# Altium PCB E001-V2.1.PcbDoc (part 2 of 2)
Units mm, origin at the board's own origin, x right, y up, seen from the top; angles counter-clockwise.
Board outline 10.25 x 28.76 mm, 4 copper layers (Top Layer, SIG, GND, Bottom Layer); 47 components, 39 nets, 149 pads, 107 vias.
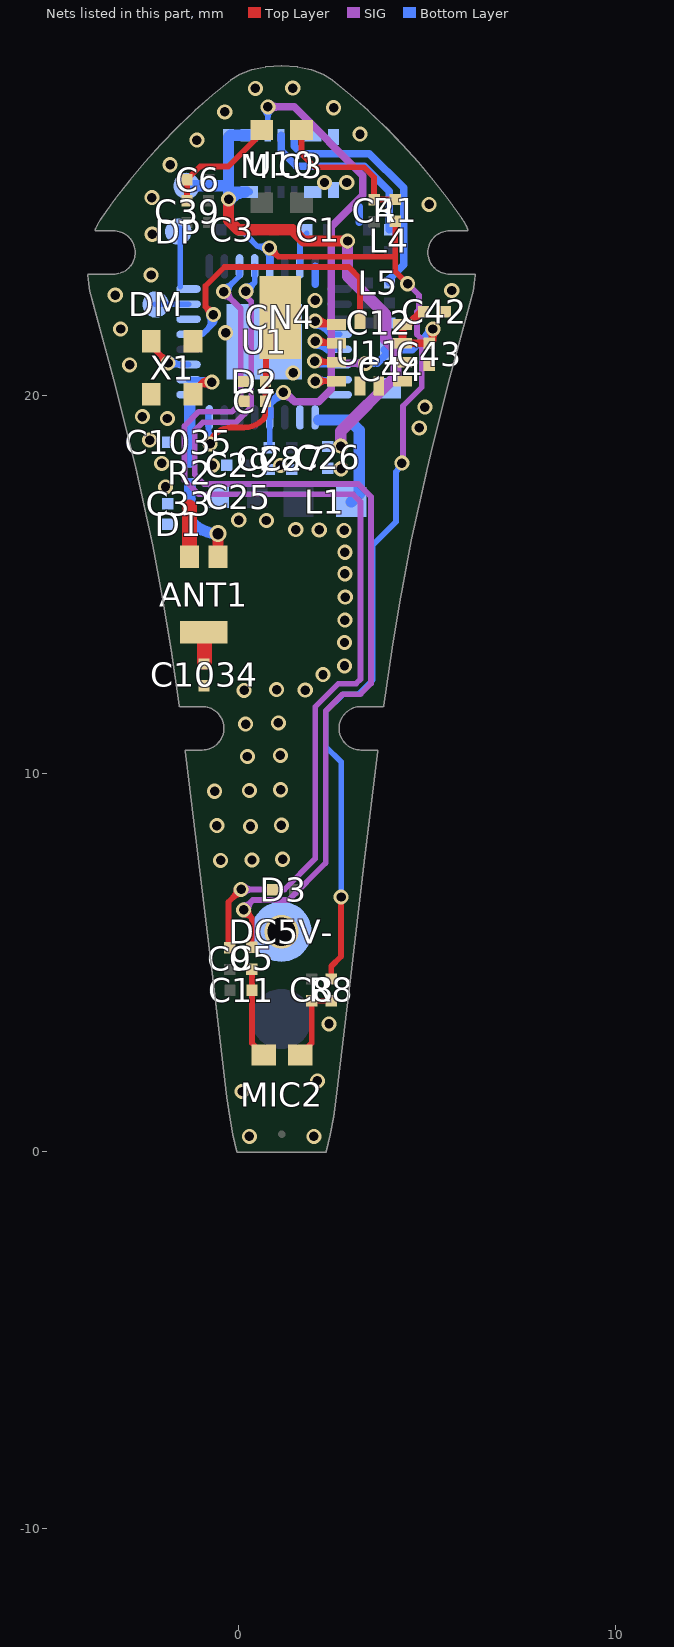
[diagram p4: the nets of this part, all layers, seen from the top]

## Via types
v1: diameter 0.4, hole 0.25, Top Layer to Bottom Layer, tented both sides, 104 vias
v2: diameter 0.9, hole 0.75, Top Layer to Bottom Layer, tented both sides, 2 vias
v3: diameter 0.45, hole 0.3, Top Layer to Bottom Layer, tented both sides, 1 vias

## Nets (pads, with @x,y where several pads share a name; then routed paths per layer and width w, separated by ;. In a path a pad name is that pad's centre, name@x,y a point inside that pad or via, vN(x,y) a via of type N, cw(c..) or ccw(c..) an arc to the next point about the centre after c; other vN are vias at no path point) (continued)
GND: ANT1.1 C7.1 C12.2 C25.1 C26.2 C27.2 C28.1 C29.1 C33.2 C42.1 C43.1 C44.1 C1034.1 C1035.2 D1.1 D2.2 D3.1 DC5V-.1 U1.0 U1.8 U10.8 U11.5 U11.6 U11.7 U11.8 X1.2 X1.4 | length 2.2
  Top Layer w0.4: ANT1.1@-1.28,15.74 -1.28,17.06
  Bottom Layer w0.2: 2.04,22.957 2.04,23.43 ; 3.21,24.6 3.21,25.01
  other v1: 0.3,0.39 2.01,0.39 0.11,1.58 2.1,1.86 2.41,3.37 -0.46,7.7 0.37,7.71 1.18,7.73 0.33,8.6 -0.56,8.62 1.15,8.63 -0.62,9.53 0.3,9.55 1.13,9.57 0.25,10.45 1.12,10.48 0.2,11.31 1.07,11.34 0.16,12.2 1.78,12.21 1.02,12.22 2.25,12.62 2.82,12.85 2.82,13.47 2.83,14.06 2.84,14.67 2.83,15.29 2.83,15.86 1.53,16.46 2.15,16.45 2.81,16.44 0.02,16.71 0.75,16.7 -1.92,17.59 2.73,18.07 -0.68,18.16 1.12,18.16 -2.02,18.21 -2.34,18.83 4.8,19.15 -1.87,19.4 -2.53,19.45 4.95,19.7 1.46,20.61 -2.87,20.82 -0.33,21.67 -3.11,21.77 2.04,22.53 -3.25,22.67 5.66,22.79 -2.3,23.2 -2.27,24.28 5.06,25.07 -2.28,25.25 2.29,25.65 2.88,25.65 -1.8,26.12 -1.09,26.77 3.23,26.93 -0.35,27.52 2.53,27.63 0.46,28.14 1.45,28.15
  other v2: 1.15,5.81
IIC_CLK: U1.21 U11.12 | length 12.8
  Top Layer w0.15: v1(-0.65,22.15) -0.86,22.36 ; U11.12@3.23,22.015 3.23,23.112 2.931,23.411 0.47,23.411 -0.361,23.411 -0.86,22.912 -0.86,22.36 ; -0.86,22.36 ccw(c-0.655,22.565) v1@-0.651,22.275 ; -0.86,22.36 cw(c-1.065,22.155) v1@-0.775,22.151 ; -0.86,22.36 ccw(c-0.655,22.565) v1@-0.651,22.275 ; -0.86,22.36 cw(c-1.065,22.155) v1@-0.775,22.151 ; -0.86,22.36 ccw(c-0.655,22.565) v1@-0.651,22.275 ; -0.86,22.36 cw(c-1.065,22.155) v1@-0.775,22.151 ; -0.86,22.36 ccw(c-0.655,22.565) v1@-0.651,22.275 ; -0.86,22.36 cw(c-1.065,22.155) v1@-0.775,22.151 ; -0.86,22.36 ccw(c-0.655,22.565) v1@-0.651,22.275 ; -0.86,22.36 cw(c-1.065,22.155) v1@-0.775,22.151
  Bottom Layer w0.15: U1.21@-1.31,21.63 -0.939,21.63 -0.65,21.919 ; -0.823,21.746 ccw(c-1.04,21.963) v1@-0.763,22.096 ; -0.823,21.746 ccw(c-1.04,21.963) v1@-0.763,22.096 ; -0.823,21.746 ccw(c-1.04,21.963) v1@-0.763,22.096 ; -0.823,21.746 ccw(c-1.04,21.963) v1@-0.763,22.096 ; -0.823,21.746 ccw(c-1.04,21.963) v1@-0.763,22.096 ; -0.673,21.896 ccw(c-0.838,22.06) v1@-0.627,22.161 ; -0.673,21.896 ccw(c-0.838,22.06) v1@-0.627,22.161 ; -0.673,21.896 ccw(c-0.838,22.06) v1@-0.627,22.161 ; -0.673,21.896 ccw(c-0.838,22.06) v1@-0.627,22.161 ; -0.673,21.896 ccw(c-0.838,22.06) v1@-0.627,22.161
IIC_DAT: U1.22
IOVDD: C28.2 C42.2 C43.2 C44.2 U1.12 U10.3 U11.9 U11.10 | length 36
  Top Layer w0.15: U11.10@4.435,21.89 U11.10@4.501,21.89
  Top Layer w0.2: U11.10@4.355,21.89 U11.9@4.355,21.39 C43.2@5.06,21.39 5.15,21.48 5.15,21.78 v1@5.14,21.79 ; U11.10@4.501,21.89 4.514,21.89 C42.2@4.877,22.253 ; v1@5.089,21.699 cw(c4.943,21.553) 5.15,21.553 ; v1@5.089,21.699 cw(c4.943,21.553) 5.15,21.553 ; v1@5.089,21.699 cw(c4.943,21.553) 5.15,21.553 ; v1@5.089,21.699 cw(c4.943,21.553) 5.15,21.553 ; v1@5.089,21.699 cw(c4.943,21.553) 5.15,21.553 ; v1@5.089,21.699 cw(c4.943,21.553) 5.15,21.553 ; v1@5.089,21.699 cw(c4.943,21.553) 5.15,21.553 ; v1@5.089,21.699 cw(c4.943,21.553) 5.15,21.553 ; v1@5.089,21.699 cw(c4.943,21.553) 5.15,21.553 ; C43.2@5.15,21.504 cw(c5.426,21.504) v1@5.231,21.699 ; C43.2@5.15,21.504 cw(c5.426,21.504) v1@5.231,21.699 ; C43.2@5.15,21.504 cw(c5.426,21.504) v1@5.231,21.699 ; C43.2@5.15,21.504 cw(c5.426,21.504) v1@5.231,21.699 ; C43.2@5.15,21.504 cw(c5.426,21.504) v1@5.231,21.699 ; C43.2@5.15,21.504 cw(c5.426,21.504) v1@5.231,21.699 ; C43.2@5.15,21.504 cw(c5.426,21.504) v1@5.231,21.699 ; C43.2@5.15,21.504 cw(c5.426,21.504) v1@5.231,21.699 ; C43.2@5.15,21.504 cw(c5.426,21.504) v1@5.231,21.699
  SIG w0.2: v1(0.79,27.65) 1.484,27.65 3.307,25.827 3.307,25.313 2.473,24.479 2.473,20.18 2.133,19.84 1.5,19.84 v1@1.25,20.09 ; 2.493,20.86 v1(3.38,20.86) ; v1@0.861,27.579 cw(c1.031,27.409) 1.031,27.65 ; v1@0.861,27.579 cw(c1.031,27.409) 1.031,27.65 ; v1@0.861,27.579 cw(c1.031,27.409) 1.031,27.65 ; v1@0.861,27.579 cw(c1.031,27.409) 1.031,27.65 ; v1@0.861,27.579 cw(c1.031,27.409) 1.031,27.65 ; v1@0.861,27.579 cw(c1.031,27.409) 1.031,27.65 ; v1@0.861,27.721 ccw(c1.031,27.891) 1.031,27.65 ; v1@0.861,27.721 ccw(c1.031,27.891) 1.031,27.65 ; v1@0.861,27.721 ccw(c1.031,27.891) 1.031,27.65 ; v1@0.861,27.721 ccw(c1.031,27.891) 1.031,27.65 ; v1@0.861,27.721 ccw(c1.031,27.891) 1.031,27.65 ; v1@0.861,27.721 ccw(c1.031,27.891) 1.031,27.65 ; v1@1.2,19.99 cw(c1.2,19.628) 1.456,19.884 ; v1@1.2,19.99 cw(c1.2,19.628) 1.456,19.884 ; v1@1.2,19.99 cw(c1.2,19.628) 1.456,19.884 ; v1@1.2,19.99 cw(c1.2,19.628) 1.456,19.884 ; v1@1.2,19.99 cw(c1.2,19.628) 1.456,19.884 ; v1@1.2,19.99 cw(c1.2,19.628) 1.456,19.884 ; 3.139,20.86 cw(c3.139,20.619) v1@3.309,20.789 ; 3.139,20.86 ccw(c3.139,21.101) v1@3.309,20.931 ; 3.139,20.86 ccw(c3.139,21.101) v1@3.309,20.931 ; 3.139,20.86 cw(c3.139,20.619) v1@3.309,20.789 ; 3.139,20.86 ccw(c3.139,21.101) v1@3.309,20.931 ; 3.139,20.86 cw(c3.139,20.619) v1@3.309,20.789 ; 3.139,20.86 ccw(c3.139,21.101) v1@3.309,20.931 ; 3.139,20.86 cw(c3.139,20.619) v1@3.309,20.789 ; 3.139,20.86 ccw(c3.139,21.101) v1@3.309,20.931 ; 3.139,20.86 cw(c3.139,20.619) v1@3.309,20.789 ; 3.139,20.86 ccw(c3.139,21.101) v1@3.309,20.931 ; 3.139,20.86 cw(c3.139,20.619) v1@3.309,20.789
  Bottom Layer w0.15: U10.3@0.79,26.9 v1(0.79,27.65) ; C28.2@0.82,18.64 0.82,18.63 0.84,18.65 U1.12@0.84,19.43 ; U1.12@0.82,19.43 U1.12@0.82,19.53 ; C44.2@3.87,21.22 C44.2@4.04,21.22 ; v1@0.702,27.562 cw(c0.488,27.348) 0.79,27.348 ; v1@0.702,27.562 cw(c0.488,27.348) 0.79,27.348 ; v1@0.702,27.562 cw(c0.488,27.348) 0.79,27.348 ; v1@0.702,27.562 cw(c0.488,27.348) 0.79,27.348 ; v1@0.702,27.562 cw(c0.488,27.348) 0.79,27.348 ; v1@0.702,27.562 cw(c0.488,27.348) 0.79,27.348 ; 0.79,27.348 cw(c1.092,27.348) v1@0.878,27.562 ; 0.79,27.348 cw(c1.092,27.348) v1@0.878,27.562 ; 0.79,27.348 cw(c1.092,27.348) v1@0.878,27.562 ; 0.79,27.348 cw(c1.092,27.348) v1@0.878,27.562 ; 0.79,27.348 cw(c1.092,27.348) v1@0.878,27.562 ; 0.79,27.348 cw(c1.092,27.348) v1@0.878,27.562
  Bottom Layer w0.2: U1.12@0.84,19.43 0.84,19.79 v1@1.14,20.09 ; v1@3.451,20.931 ccw(c3.597,21.077) 3.597,20.87 ; 3.69,20.87 C44.2@4.04,21.22 4.61,21.22 v1(5.16,21.77) ; C44.2@3.87,21.22 C44.2@3.955,21.305 ; 0.927,19.877 cw(c1.2,19.604) v1@1.2,19.99 ; 0.927,19.877 cw(c1.2,19.604) v1@1.2,19.99 ; 0.927,19.877 cw(c1.2,19.604) v1@1.2,19.99 ; 0.927,19.877 cw(c1.2,19.604) v1@1.2,19.99 ; 0.927,19.877 cw(c1.2,19.604) v1@1.2,19.99 ; 0.927,19.877 cw(c1.2,19.604) v1@1.2,19.99 ; 4.989,21.599 cw(c5.16,21.429) v1@5.16,21.67 ; 4.989,21.599 ccw(c4.819,21.77) v1@5.06,21.77 ; 4.989,21.599 cw(c5.16,21.429) v1@5.16,21.67 ; 4.989,21.599 ccw(c4.819,21.77) v1@5.06,21.77 ; 4.989,21.599 cw(c5.16,21.429) v1@5.16,21.67 ; 4.989,21.599 ccw(c4.819,21.77) v1@5.06,21.77 ; 4.989,21.599 ccw(c4.819,21.77) v1@5.06,21.77 ; 4.989,21.599 cw(c5.16,21.429) v1@5.16,21.67 ; 4.989,21.599 ccw(c4.819,21.77) v1@5.06,21.77 ; 4.989,21.599 cw(c5.16,21.429) v1@5.16,21.67 ; 4.989,21.599 ccw(c4.819,21.77) v1@5.06,21.77 ; 4.989,21.599 cw(c5.16,21.429) v1@5.16,21.67 ; 4.989,21.599 ccw(c4.819,21.77) v1@5.06,21.77 ; 4.989,21.599 cw(c5.16,21.429) v1@5.16,21.67 ; 4.989,21.599 ccw(c4.819,21.77) v1@5.06,21.77 ; 4.989,21.599 cw(c5.16,21.429) v1@5.16,21.67
  other v1: 1.2,20.09
MIC_VDD: C3.1 R1.2 R8.2 U1.29 | length 27.8
  Top Layer w0.15: v1@0.83,23.795 cw(c0.83,23.493) 1.043,23.707 cw(c1.257,23.92) v1@0.955,23.92 ; v1(0.83,23.92) 1.062,23.688 4.132,23.688 ; R8.2@2.47,4.56 2.47,4.898 2.725,5.153 v1@2.725,6.685 ; R1.2@4.16,24.62 4.16,23.3 v1(4.49,22.97)
  SIG w0.15: v1@4.37,18.22 4.37,19.733 4.863,20.226 4.863,21.498 4.738,21.623 4.738,22.229 4.792,22.283 4.792,22.668 v1(4.49,22.97)
  Bottom Layer w0.15: C3.1@0.13,24.4 0.13,24.344 0.257,24.217 0.516,23.958 ; 0.62,23.958 ccw(c0.62,24.13) v1@0.742,24.008 ; v1@0.728,23.848 ccw(c0.516,23.7) 0.516,23.958 ; v1@0.792,23.958 0.516,23.958 ; v1(2.73,6.73) 2.73,10.31 2.32,10.72 2.32,11.29 2.32,11.64 2.778,12.098 3.19,12.098 3.569,12.477 3.569,16.052 4.182,16.665 4.182,17.992 ; 4.217,18.027 ccw(c4.143,18.101) v1@4.233,18.156
  Bottom Layer w0.2: v1@0.759,23.849 cw(c0.564,23.654) U1.29@0.84,23.654 ; v1(0.83,23.92) 0.84,23.91 U1.29@0.84,23.43 ; U1.29@0.84,23.703 cw(c1.047,23.703) v1@0.901,23.849
  other v1: 4.34,18.22
NetANT1_2: ANT1.2 C33.1 D1.2 R2.2 | length 2.8
  Top Layer w0.3: ANT1.2@-0.53,15.81 v3(-0.53,16.35)
  Bottom Layer w0.3: D1.2@-1.28,16.6 -1.28,16.82 ; R2.2@-1.28,17.67 C33.1@-1.28,17.14 -1.28,16.82 ; v3(-0.53,16.35) cw(c-0.53,17.292) -1.196,16.626 D1.2@-1.202,16.632 ; -1.28,16.82 ccw(c-1.015,16.82) D1.2@-1.202,16.632 ; -1.28,16.82 ccw(c-1.015,16.82) D1.2@-1.202,16.632
NetANT1_3: ANT1.3 C1034.2 | length 0.9
  Top Layer w0.4: C1034.2@-0.89,12.95 ANT1.3@-0.89,13.805
NetC4_1: C4.1 MIC3.1 R1.1 | length 4
  Top Layer w0.15: MIC3.1@1.68,27.04 1.68,26.41 2.038,26.052 3.337,26.052 3.6,25.789 C4.1@3.6,25.2 ; C4.1@3.622,25.202 C4.1@3.62,25.2 ; R1.1@4.13,25.23 R1.1@4.16,25.2 C4.1@3.62,25.2 ; C4.1@3.6,25.2 C4.1@3.62,25.2 ; C4.1@3.6,25.2 C4.1@3.61,25.19 C4.1@3.62,25.2
NetC5_1: C5.1 C11.2 MIC2.1 | length 2.4
  Top Layer w0.15: C5.1@0.36,4.82 0.37,4.81 C11.2@0.37,4.26 0.37,2.86 MIC2.1@0.68,2.55
NetC6_1: C6.1 C39.1 MIC3.4 | length 3.1
  Top Layer w0.15: C39.1@-1.35,25.17 C6.1@-1.35,25.72 ; MIC3.4@0.63,27.04 0.63,26.96 -0.258,26.072 -1.004,26.072 C6.1@-1.35,25.726 ; C6.1@-1.35,25.72 cw(c-1.229,25.72) C6.1@-1.35,25.726 ; C6.1@-1.35,25.72 cw(c-1.229,25.72) C6.1@-1.35,25.726 ; C6.1@-1.35,25.72 cw(c-1.109,25.72) C6.1@-1.35,25.726 ; C6.1@-1.35,25.72 C6.1@-1.35,25.726
NetC8_2: C8.2 MIC2.2 R8.1 | length 2.1
  Top Layer w0.15: MIC2.2@1.643,2.55 1.95,2.857 C8.2@1.95,3.98 R8.1@2.47,3.98
NetC1035_1: C1035.1 R2.1 U1.17 | length 1.7
  Bottom Layer w0.3: R2.1@-1.28,18.25 C1035.1@-1.28,18.77 -1.28,19.92
NetL1_2: L1.2 U1.9 | length 3.2
  Bottom Layer w0.3: U1.9@2.13,19.36 2.94,19.36 3.207,19.093 3.207,17.397 L1.2@3,17.19
P/P/POWER: C7.2 CN4.1 D2.1 U1.16 | length 12
  Top Layer w0.15: 0.66,19.37 cw(c0.158,19.872) 0.158,19.162 0.111,19.162 -0.18,19.162 ; 0.66,19.365 ccw(c0.515,19.51) 0.72,19.51 ; 0.72,19.52 C7.2@0.72,19.825 ; C7.2@0.73,19.88 D2.1@0.73,20.4 ; D2.1@0.74,20.38 CN4.1@0.74,21.74 ; CN4.1@0.77,21.74 CN4.1@1.13,22.1 ; v1@-0.74,18.748 cw(c-0.228,18.748) -0.74,18.759 v1@-0.74,18.748 ; v1@-0.74,18.748 v1(-0.74,18.73) cw(c-0.45,18.73) -0.655,18.935 -0.603,18.987 ; v1@-0.631,18.791 cw(c-0.487,18.871) -0.603,18.987 ; v1@-0.631,18.791 cw(c-0.487,18.871) -0.603,18.987 ; v1@-0.631,18.791 cw(c-0.487,18.871) -0.603,18.987 ; v1@-0.631,18.791 cw(c-0.487,18.871) -0.603,18.987 ; v1@-0.631,18.791 cw(c-0.487,18.871) -0.603,18.987 ; v1@-0.631,18.791 cw(c-0.487,18.871) -0.603,18.987 ; v1@-0.631,18.791 cw(c-0.487,18.871) -0.603,18.987 ; v1@-0.631,18.791 cw(c-0.487,18.871) -0.603,18.987 ; v1@-0.631,18.791 cw(c-0.487,18.871) -0.603,18.987 ; -0.603,18.987 cw(c-0.18,18.563) -0.18,19.162 ; -0.603,18.987 cw(c-0.18,18.563) -0.18,19.162
  Bottom Layer w0.15: v1@-0.78,18.77 U1.16@-0.78,19.53 ; v1@-0.828,18.818 ccw(c-0.945,18.935) -0.78,18.935 ; v1@-0.828,18.818 ccw(c-0.945,18.935) -0.78,18.935 ; v1@-0.828,18.818 ccw(c-0.945,18.935) -0.78,18.935 ; v1@-0.828,18.818 ccw(c-0.945,18.935) -0.78,18.935 ; v1@-0.828,18.818 ccw(c-0.945,18.935) -0.78,18.935 ; v1@-0.828,18.818 ccw(c-0.945,18.935) -0.78,18.935 ; v1@-0.828,18.818 ccw(c-0.945,18.935) -0.78,18.935 ; v1@-0.828,18.818 ccw(c-0.945,18.935) -0.78,18.935 ; v1@-0.828,18.818 ccw(c-0.945,18.935) -0.78,18.935 ; U1.16@-0.78,19.128 ccw(c-0.342,19.128) v1@-0.652,18.818 ; U1.16@-0.78,19.128 ccw(c-0.342,19.128) v1@-0.652,18.818 ; U1.16@-0.78,19.128 ccw(c-0.342,19.128) v1@-0.652,18.818 ; U1.16@-0.78,19.128 ccw(c-0.342,19.128) v1@-0.652,18.818 ; U1.16@-0.78,19.128 ccw(c-0.342,19.128) v1@-0.652,18.818 ; U1.16@-0.78,19.128 ccw(c-0.342,19.128) v1@-0.652,18.818 ; U1.16@-0.78,19.128 ccw(c-0.342,19.128) v1@-0.652,18.818 ; U1.16@-0.78,19.128 ccw(c-0.342,19.128) v1@-0.652,18.818 ; U1.16@-0.78,19.128 ccw(c-0.342,19.128) v1@-0.652,18.818
PG5: U1.7 U11.4 | length 9.8
  Top Layer w0.15: v1@2.06,20.39 U11.4@2.685,20.39 ; v1@2.128,20.302 cw(c2.342,20.088) 2.342,20.39 ; v1@2.128,20.302 cw(c2.342,20.088) 2.342,20.39 ; v1@2.128,20.302 cw(c2.342,20.088) 2.342,20.39 ; v1@2.128,20.302 cw(c2.342,20.088) 2.342,20.39 ; v1@2.128,20.302 cw(c2.342,20.088) 2.342,20.39 ; v1@2.128,20.302 cw(c2.342,20.088) 2.342,20.39 ; v1@2.128,20.302 cw(c2.342,20.088) 2.342,20.39 ; v1@2.128,20.302 cw(c2.342,20.088) 2.342,20.39 ; v1@2.128,20.302 cw(c2.342,20.088) 2.342,20.39 ; v1@2.128,20.478 ccw(c2.342,20.692) 2.342,20.39 ; v1@2.128,20.478 ccw(c2.342,20.692) 2.342,20.39 ; v1@2.128,20.478 ccw(c2.342,20.692) 2.342,20.39 ; v1@2.128,20.478 ccw(c2.342,20.692) 2.342,20.39 ; v1@2.128,20.478 ccw(c2.342,20.692) 2.342,20.39 ; v1@2.128,20.478 ccw(c2.342,20.692) 2.342,20.39 ; v1@2.128,20.478 ccw(c2.342,20.692) 2.342,20.39 ; v1@2.128,20.478 ccw(c2.342,20.692) 2.342,20.39 ; v1@2.128,20.478 ccw(c2.342,20.692) 2.342,20.39
  Bottom Layer w0.15: v1@2.06,20.39 2.1,20.43 U1.7@2.69,20.43 ; v1@2.128,20.302 cw(c2.438,19.992) U1.7@2.438,20.43 ; v1@2.128,20.302 cw(c2.438,19.992) U1.7@2.438,20.43 ; v1@2.128,20.302 cw(c2.438,19.992) U1.7@2.438,20.43 ; v1@2.128,20.302 cw(c2.438,19.992) U1.7@2.438,20.43 ; v1@2.128,20.302 cw(c2.438,19.992) U1.7@2.438,20.43 ; v1@2.128,20.302 cw(c2.438,19.992) U1.7@2.438,20.43 ; v1@2.128,20.302 cw(c2.438,19.992) U1.7@2.438,20.43 ; v1@2.128,20.302 cw(c2.438,19.992) U1.7@2.438,20.43 ; v1@2.128,20.302 cw(c2.438,19.992) U1.7@2.438,20.43 ; v1@2.128,20.478 ccw(c2.245,20.595) 2.245,20.43 ; v1@2.128,20.478 ccw(c2.245,20.595) 2.245,20.43 ; v1@2.128,20.478 ccw(c2.245,20.595) 2.245,20.43 ; v1@2.128,20.478 ccw(c2.245,20.595) 2.245,20.43 ; v1@2.128,20.478 ccw(c2.245,20.595) 2.245,20.43 ; v1@2.128,20.478 ccw(c2.245,20.595) 2.245,20.43 ; v1@2.128,20.478 ccw(c2.245,20.595) 2.245,20.43 ; v1@2.128,20.478 ccw(c2.245,20.595) 2.245,20.43 ; v1@2.128,20.478 ccw(c2.245,20.595) 2.245,20.43
  other v1: 2.04,20.39
PG6: U1.6 U11.3 | length 9.9
  Top Layer w0.15: v1@2.06,20.89 U11.3@2.685,20.89 ; v1@2.118,20.832 cw(c2.26,20.69) 2.26,20.89 ; v1@2.118,20.832 cw(c2.26,20.69) 2.26,20.89 ; v1@2.118,20.832 cw(c2.26,20.69) 2.26,20.89 ; v1@2.118,20.832 cw(c2.26,20.69) 2.26,20.89 ; v1@2.118,20.832 cw(c2.26,20.69) 2.26,20.89 ; v1@2.118,20.832 cw(c2.26,20.69) 2.26,20.89 ; v1@2.118,20.832 cw(c2.26,20.69) 2.26,20.89 ; v1@2.118,20.832 cw(c2.26,20.69) 2.26,20.89 ; v1@2.118,20.832 cw(c2.26,20.69) 2.26,20.89 ; v1@2.118,21.008 ccw(c2.404,21.294) U11.3@2.404,20.89 ; v1@2.118,21.008 ccw(c2.404,21.294) U11.3@2.404,20.89 ; v1@2.118,21.008 ccw(c2.404,21.294) U11.3@2.404,20.89 ; v1@2.118,21.008 ccw(c2.404,21.294) U11.3@2.404,20.89 ; v1@2.118,21.008 ccw(c2.404,21.294) U11.3@2.404,20.89 ; v1@2.118,21.008 ccw(c2.404,21.294) U11.3@2.404,20.89 ; v1@2.118,21.008 ccw(c2.404,21.294) U11.3@2.404,20.89 ; v1@2.118,21.008 ccw(c2.404,21.294) U11.3@2.404,20.89 ; v1@2.118,21.008 ccw(c2.404,21.294) U11.3@2.404,20.89
  Bottom Layer w0.15: v1(2.03,20.92) 2.12,20.83 U1.6@2.69,20.83 U1.6@2.688,20.832 ; v1@2.118,21.008 ccw(c2.549,21.439) U1.6@2.549,20.83 ; v1@2.118,21.008 ccw(c2.549,21.439) U1.6@2.549,20.83 ; v1@2.118,21.008 ccw(c2.549,21.439) U1.6@2.549,20.83 ; v1@2.118,21.008 ccw(c2.549,21.439) U1.6@2.549,20.83 ; v1@2.118,21.008 ccw(c2.549,21.439) U1.6@2.549,20.83 ; v1@2.118,21.008 ccw(c2.549,21.439) U1.6@2.549,20.83 ; v1@2.118,21.008 ccw(c2.549,21.439) U1.6@2.549,20.83 ; v1@2.118,21.008 ccw(c2.549,21.439) U1.6@2.549,20.83 ; v1@2.118,21.008 ccw(c2.549,21.439) U1.6@2.549,20.83
PG7: U1.5 U11.2 | length 8.4
  Top Layer w0.15: v1@2.07,21.38 2.08,21.39 U11.2@2.685,21.39 ; v1@2.128,21.538 ccw(c2.487,21.897) U11.2@2.487,21.39 ; v1@2.128,21.538 ccw(c2.487,21.897) U11.2@2.487,21.39 ; v1@2.128,21.538 ccw(c2.487,21.897) U11.2@2.487,21.39 ; v1@2.128,21.538 ccw(c2.487,21.897) U11.2@2.487,21.39 ; v1@2.128,21.538 ccw(c2.487,21.897) U11.2@2.487,21.39 ; v1@2.128,21.538 ccw(c2.487,21.897) U11.2@2.487,21.39 ; v1@2.128,21.538 ccw(c2.487,21.897) U11.2@2.487,21.39 ; v1@2.128,21.538 ccw(c2.487,21.897) U11.2@2.487,21.39 ; v1@2.128,21.538 ccw(c2.487,21.897) U11.2@2.487,21.39
  Bottom Layer w0.15: v1(2.04,21.45) 2.11,21.45 2.33,21.23 U1.5@2.69,21.23 U1.5@2.43,21.23 ; v1@2.042,21.325 cw(c2.051,20.881) 2.365,21.195 ; v1@2.042,21.325 cw(c2.051,20.881) 2.365,21.195 ; v1@2.042,21.325 cw(c2.051,20.881) 2.365,21.195 ; v1@2.042,21.325 cw(c2.051,20.881) 2.365,21.195 ; v1@2.042,21.325 cw(c2.051,20.881) 2.365,21.195 ; v1@2.042,21.325 cw(c2.051,20.881) 2.365,21.195 ; v1@2.042,21.325 cw(c2.051,20.881) 2.365,21.195 ; v1@2.042,21.325 cw(c2.051,20.881) 2.365,21.195 ; v1@2.042,21.325 cw(c2.051,20.881) 2.365,21.195
PG8: U1.4 U11.1 | length 10
  Top Layer w0.15: v1@2.055,21.89 U11.1@2.685,21.89 ; v1@2.128,22.068 ccw(c2.559,22.499) U11.1@2.559,21.89 ; v1@2.128,22.068 ccw(c2.559,22.499) U11.1@2.559,21.89 ; v1@2.128,22.068 ccw(c2.559,22.499) U11.1@2.559,21.89 ; v1@2.128,22.068 ccw(c2.559,22.499) U11.1@2.559,21.89 ; v1@2.128,22.068 ccw(c2.559,22.499) U11.1@2.559,21.89 ; v1@2.128,22.068 ccw(c2.559,22.499) U11.1@2.559,21.89 ; v1@2.128,22.068 ccw(c2.559,22.499) U11.1@2.559,21.89 ; v1@2.128,22.068 ccw(c2.559,22.499) U11.1@2.559,21.89 ; v1@2.128,22.068 ccw(c2.559,22.499) U11.1@2.559,21.89
  Bottom Layer w0.15: v1(2.04,21.98) 2.088,21.98 2.438,21.63 U1.4@2.69,21.63 ; v1@2.04,21.855 cw(c2.04,21.438) 2.335,21.733 ; v1@2.04,21.855 cw(c2.04,21.438) 2.335,21.733 ; v1@2.04,21.855 cw(c2.04,21.438) 2.335,21.733 ; v1@2.04,21.855 cw(c2.04,21.438) 2.335,21.733 ; v1@2.04,21.855 cw(c2.04,21.438) 2.335,21.733 ; v1@2.04,21.855 cw(c2.04,21.438) 2.335,21.733 ; v1@2.04,21.855 cw(c2.04,21.438) 2.335,21.733 ; v1@2.04,21.855 cw(c2.04,21.438) 2.335,21.733 ; v1@2.04,21.855 cw(c2.04,21.438) 2.335,21.733 ; v1@2.165,21.98 ccw(c2.351,21.98) 2.22,21.848 ; v1@2.165,21.98 ccw(c2.351,21.98) 2.22,21.848 ; v1@2.165,21.98 ccw(c2.351,21.98) 2.22,21.848 ; v1@2.165,21.98 ccw(c2.351,21.98) 2.22,21.848 ; v1@2.165,21.98 ccw(c2.351,21.98) 2.22,21.848 ; v1@2.165,21.98 ccw(c2.351,21.98) 2.22,21.848 ; v1@2.165,21.98 ccw(c2.351,21.98) 2.22,21.848 ; v1@2.165,21.98 ccw(c2.351,21.98) 2.22,21.848 ; v1@2.165,21.98 ccw(c2.351,21.98) 2.22,21.848
SPKN: L4.1 U10.2 | length 4.7
  Bottom Layer w0.2: U10.2@1.14,26.9 1.14,26.495 1.549,26.086 3.344,26.086 4.01,25.42 L4.1@4.01,24.4
SPKP: L5.1 U10.1 | length 6.3
  Bottom Layer w0.2: U10.1@1.49,26.9 1.49,26.607 1.684,26.413 3.479,26.413 4.387,25.505 4.387,23.471 4.01,23.094 L5.1@4.01,22.99
TK_MICN: C9.2 U1.27 | length 36.7
  Top Layer w0.15: C9.2@-0.22,5.39 -0.252,5.422 -0.252,6.598 v1(0.08,6.93) ; -0.133,6.717 ccw(c-0.347,6.93) -0.045,6.93 cw(c-0.347,6.93) -0.133,6.717 ; -0.133,6.717 cw(c0.08,6.503) 0.08,6.805 ccw(c0.08,6.503) -0.133,6.717
  SIG w0.15: v1(-0.38,22.76) 0.072,22.308 0.072,19.813 -0.163,19.578 -1.045,19.578 -1.419,19.204 -1.419,17.769 -1.041,17.391 3.049,17.391 3.243,17.197 3.243,12.495 3.128,12.38 2.658,12.38 2.043,11.765 2.043,7.743 1.23,6.93 v1@0.101,6.93 ; v1(0.08,6.93) v1@0.101,6.93 ; v1@0.091,6.919 v1@0.101,6.93 ; v1@-0.38,22.635 cw(c-0.38,22.333) -0.167,22.547 ; v1@-0.38,22.635 cw(c-0.38,22.333) -0.167,22.547 ; v1@-0.38,22.635 cw(c-0.38,22.333) -0.167,22.547 ; v1@-0.38,22.635 cw(c-0.38,22.333) -0.167,22.547 ; v1@-0.38,22.635 cw(c-0.38,22.333) -0.167,22.547 ; v1@-0.38,22.635 cw(c-0.38,22.333) -0.167,22.547 ; v1@-0.38,22.635 cw(c-0.38,22.333) -0.167,22.547 ; v1@-0.38,22.635 cw(c-0.38,22.333) -0.167,22.547 ; v1@-0.38,22.635 cw(c-0.38,22.333) -0.167,22.547 ; v1@-0.255,22.76 ccw(c0.047,22.76) -0.167,22.547 ; v1@-0.255,22.76 ccw(c0.047,22.76) -0.167,22.547 ; v1@-0.255,22.76 ccw(c0.047,22.76) -0.167,22.547 ; v1@-0.255,22.76 ccw(c0.047,22.76) -0.167,22.547 ; v1@-0.255,22.76 ccw(c0.047,22.76) -0.167,22.547 ; v1@-0.255,22.76 ccw(c0.047,22.76) -0.167,22.547 ; v1@-0.255,22.76 ccw(c0.047,22.76) -0.167,22.547 ; v1@-0.255,22.76 ccw(c0.047,22.76) -0.167,22.547 ; v1@-0.255,22.76 ccw(c0.047,22.76) -0.167,22.547 ; 0.382,6.93 ccw(c0.382,6.628) 0.168,6.842 cw(c0.382,6.628) 0.382,6.93 ; 0.382,6.93 cw(c0.382,7.232) 0.168,7.018 ccw(c0.382,7.232) 0.382,6.93
  Bottom Layer w0.15: v1@-0.348,22.79 0.04,23.178 U1.27@0.04,23.43 ; v1@-0.38,22.885 ccw(c-0.38,23.192) -0.163,22.975 ; v1@-0.38,22.885 ccw(c-0.38,23.192) -0.163,22.975 ; v1@-0.38,22.885 ccw(c-0.38,23.192) -0.163,22.975 ; v1@-0.38,22.885 ccw(c-0.38,23.192) -0.163,22.975 ; v1@-0.38,22.885 ccw(c-0.38,23.192) -0.163,22.975 ; v1@-0.38,22.885 ccw(c-0.38,23.192) -0.163,22.975 ; v1@-0.38,22.885 ccw(c-0.38,23.192) -0.163,22.975 ; v1@-0.38,22.885 ccw(c-0.38,23.192) -0.163,22.975 ; v1@-0.38,22.885 ccw(c-0.38,23.192) -0.163,22.975 ; v1@-0.255,22.76 cw(c0.042,22.76) -0.168,22.97 ; v1@-0.255,22.76 cw(c0.042,22.76) -0.168,22.97 ; v1@-0.255,22.76 cw(c0.042,22.76) -0.168,22.97 ; v1@-0.255,22.76 cw(c0.042,22.76) -0.168,22.97 ; v1@-0.255,22.76 cw(c0.042,22.76) -0.168,22.97 ; v1@-0.255,22.76 cw(c0.042,22.76) -0.168,22.97 ; v1@-0.255,22.76 cw(c0.042,22.76) -0.168,22.97 ; v1@-0.255,22.76 cw(c0.042,22.76) -0.168,22.97 ; v1@-0.255,22.76 cw(c0.042,22.76) -0.168,22.97
TK_MICP: C5.2 U1.28 | length 36
  Top Layer w0.15: v1@0.07,6.33 v1@0.08,6.32 ; v1(0.15,6.39) 0.36,6.18 ; C5.2@0.36,5.4 0.36,6.18 ; v1@0.151,6.265 cw(c0.155,5.975) 0.36,6.18 ; v1@0.151,6.265 cw(c0.155,5.975) 0.36,6.18 ; v1@0.151,6.265 cw(c0.155,5.975) 0.36,6.18 ; v1@0.151,6.265 cw(c0.155,5.975) 0.36,6.18 ; v1@0.151,6.265 cw(c0.155,5.975) 0.36,6.18 ; v1@0.151,6.265 cw(c0.155,5.975) 0.36,6.18 ; v1@0.275,6.389 ccw(c0.565,6.385) 0.36,6.18 ; v1@0.275,6.389 ccw(c0.565,6.385) 0.36,6.18 ; v1@0.275,6.389 ccw(c0.565,6.385) 0.36,6.18 ; v1@0.275,6.389 ccw(c0.565,6.385) 0.36,6.18 ; v1@0.275,6.389 ccw(c0.565,6.385) 0.36,6.18 ; v1@0.275,6.389 ccw(c0.565,6.385) 0.36,6.18
  SIG w0.15: v1@0.07,6.33 0.393,6.653 1.344,6.653 2.32,7.629 2.32,11.65 2.773,12.103 3.243,12.103 3.52,12.38 3.52,17.33 3.182,17.668 -0.9,17.668 -1.142,17.91 -1.142,19.089 -0.93,19.301 -0.049,19.301 0.349,19.699 0.349,22.1 ; v1@0.14,22.71 0.28,22.57 0.349,22.501 0.349,22.1 ; 0.349,22.3 0.349,22.1 ; v1@0.15,6.515 ccw(c0.15,6.769) 0.329,6.589 ; v1@0.15,6.515 ccw(c0.15,6.769) 0.329,6.589 ; v1@0.15,6.515 ccw(c0.15,6.769) 0.329,6.589 ; v1@0.15,6.515 ccw(c0.15,6.769) 0.329,6.589 ; v1@0.15,6.515 ccw(c0.15,6.769) 0.329,6.589 ; v1@0.15,6.515 ccw(c0.15,6.769) 0.329,6.589 ; v1@0.15,6.515 ccw(c0.15,6.769) 0.329,6.589 ; v1@0.15,6.515 ccw(c0.15,6.769) 0.329,6.589 ; v1@0.15,6.515 ccw(c0.15,6.769) 0.329,6.589 ; v1@0.275,6.39 cw(c0.625,6.39) 0.378,6.638 ; v1@0.275,6.39 cw(c0.625,6.39) 0.378,6.638 ; v1@0.275,6.39 cw(c0.625,6.39) 0.378,6.638 ; v1@0.275,6.39 cw(c0.625,6.39) 0.378,6.638 ; v1@0.275,6.39 cw(c0.625,6.39) 0.378,6.638 ; v1@0.275,6.39 cw(c0.625,6.39) 0.378,6.638 ; v1@0.275,6.39 cw(c0.625,6.39) 0.378,6.638 ; v1@0.275,6.39 cw(c0.625,6.39) 0.378,6.638 ; v1@0.275,6.39 cw(c0.625,6.39) 0.378,6.638
  Bottom Layer w0.15: v1@0.28,22.84 0.44,23 U1.28@0.44,23.43 ; v1@0.21,22.895 ccw(c0.21,23.197) 0.423,22.983 ; v1@0.21,22.895 ccw(c0.21,23.197) 0.423,22.983 ; v1@0.21,22.895 ccw(c0.21,23.197) 0.423,22.983 ; v1@0.21,22.895 ccw(c0.21,23.197) 0.423,22.983 ; v1@0.21,22.895 ccw(c0.21,23.197) 0.423,22.983 ; v1@0.21,22.895 ccw(c0.21,23.197) 0.423,22.983 ; v1@0.335,22.77 cw(c0.637,22.77) 0.423,22.983 ; v1@0.335,22.77 cw(c0.637,22.77) 0.423,22.983 ; v1@0.335,22.77 cw(c0.637,22.77) 0.423,22.983 ; v1@0.335,22.77 cw(c0.637,22.77) 0.423,22.983 ; v1@0.335,22.77 cw(c0.637,22.77) 0.423,22.983 ; v1@0.335,22.77 cw(c0.637,22.77) 0.423,22.983
  other v1: 0.21,22.77
USBDM: DM.1 U1.23 | length 0.9
  Bottom Layer w0.15: DM.1@-2.2,22.43 U1.23@-1.31,22.43
USBDP: DP.1 U1.24 | length 1.5
  Bottom Layer w0.15: U1.24@-1.532,22.892 -1.532,23.86 -1.532,24.35 DP.1@-1.532,24.43
VBAT: C26.1 pad.0 U1.10 U10.4 | length 18.5
  Top Layer w0.3: v1(-0.25,25.21) -0.25,24.65 0.003,24.397 1.44,24.397 1.737,24.1 v1(2.9,24.1) v1@2.896,24.096
  SIG w0.3: v1(2.72,18.67) 2.72,19.063 4.184,20.527 4.184,21.217 3.913,21.488 3.913,22.147 2.9,23.16 v1(2.9,24.1)
  Bottom Layer w0.2: U10.4@0.17,25.45 0.25,25.45 U10.4@0.3,25.4
  Bottom Layer w0.3: pad.0@-1.36,25.56 U10.4@-0.36,25.56 ; v1(-0.25,25.21) -0.25,25.174 U10.4@-0.25,25.45 U10.4@-0.25,26.85 -0.2,26.9 U10.4@0.3,26.9 ; U10.4@-0.24,25.39 U10.4@0.18,25.39 ; v1@-0.208,25.182 cw(c0.18,24.923) U10.4@0.18,25.39 ; v1@-0.208,25.182 cw(c0.18,24.923) U10.4@0.18,25.39 ; v1@-0.208,25.182 cw(c0.18,24.923) U10.4@0.18,25.39 ; v1@-0.208,25.182 cw(c0.18,24.923) U10.4@0.18,25.39 ; v1@-0.208,25.182 cw(c0.18,24.923) U10.4@0.18,25.39 ; v1@-0.208,25.182 cw(c0.18,24.923) U10.4@0.18,25.39 ; v1@-0.208,25.182 cw(c0.18,24.923) U10.4@0.18,25.39 ; v1@-0.208,25.182 cw(c0.18,24.923) U10.4@0.18,25.39 ; v1@-0.208,25.182 cw(c0.18,24.923) U10.4@0.18,25.39
VCM: C1.1 U1.31 | length 0.9
  Bottom Layer w0.15: U1.31@1.64,23.43 1.64,24.12 C1.1@1.82,24.3
XOSCI: U1.18 X1.3 | length 18.1
  Top Layer w0.15: X1.3@-1.196,20.045 -1.196,20.12 -0.953,20.363 ; v1(-0.692,20.363) -0.953,20.363 ; X1.3@-1.083,20.233 cw(c-0.907,20.056) v1@-0.764,20.261 ; X1.3@-1.083,20.233 cw(c-0.907,20.056) v1@-0.764,20.261 ; X1.3@-1.083,20.233 cw(c-0.907,20.056) v1@-0.764,20.261 ; X1.3@-1.083,20.233 cw(c-0.907,20.056) v1@-0.764,20.261 ; X1.3@-1.083,20.233 cw(c-0.907,20.056) v1@-0.764,20.261 ; X1.3@-1.083,20.233 cw(c-0.907,20.056) v1@-0.764,20.261 ; X1.3@-1.083,20.233 cw(c-0.907,20.056) v1@-0.764,20.261 ; X1.3@-1.083,20.233 cw(c-0.907,20.056) v1@-0.764,20.261 ; X1.3@-1.083,20.233 cw(c-0.907,20.056) v1@-0.764,20.261 ; X1.3@-1.082,20.234 cw(c-0.709,19.861) v1@-0.691,20.388 ; X1.3@-1.082,20.234 cw(c-0.709,19.861) v1@-0.691,20.388 ; X1.3@-1.082,20.234 cw(c-0.709,19.861) v1@-0.691,20.388 ; X1.3@-1.082,20.234 cw(c-0.709,19.861) v1@-0.691,20.388 ; X1.3@-1.082,20.234 cw(c-0.709,19.861) v1@-0.691,20.388 ; X1.3@-1.082,20.234 cw(c-0.709,19.861) v1@-0.691,20.388 ; X1.3@-1.082,20.234 cw(c-0.709,19.861) v1@-0.691,20.388 ; X1.3@-1.082,20.234 cw(c-0.709,19.861) v1@-0.691,20.388 ; X1.3@-1.082,20.234 cw(c-0.709,19.861) v1@-0.691,20.388 ; -0.957,20.359 cw(c-0.803,20.205) v1@-0.678,20.383 ; -0.957,20.359 cw(c-0.803,20.205) v1@-0.678,20.383 ; -0.957,20.359 cw(c-0.803,20.205) v1@-0.678,20.383 ; -0.957,20.359 cw(c-0.803,20.205) v1@-0.678,20.383 ; -0.957,20.359 cw(c-0.803,20.205) v1@-0.678,20.383 ; -0.957,20.359 cw(c-0.803,20.205) v1@-0.678,20.383 ; -0.957,20.359 cw(c-0.803,20.205) v1@-0.678,20.383 ; -0.957,20.359 cw(c-0.803,20.205) v1@-0.678,20.383 ; -0.957,20.359 cw(c-0.803,20.205) v1@-0.678,20.383 ; -0.953,20.363 cw(c-0.953,20.154) v1@-0.79,20.285 ; -0.953,20.363 ccw(c-0.953,20.572) v1@-0.79,20.441 ; -0.953,20.363 cw(c-0.953,20.154) v1@-0.79,20.285 ; -0.953,20.363 ccw(c-0.953,20.572) v1@-0.79,20.441 ; -0.953,20.363 cw(c-0.953,20.154) v1@-0.79,20.285 ; -0.953,20.363 ccw(c-0.953,20.572) v1@-0.79,20.441 ; -0.953,20.363 cw(c-0.953,20.154) v1@-0.79,20.285 ; -0.953,20.363 ccw(c-0.953,20.572) v1@-0.79,20.441 ; -0.953,20.363 ccw(c-0.953,20.572) v1@-0.79,20.441 ; -0.953,20.363 cw(c-0.953,20.154) v1@-0.79,20.285 ; -0.953,20.363 ccw(c-0.953,20.572) v1@-0.79,20.441 ; -0.953,20.363 cw(c-0.953,20.154) v1@-0.79,20.285 ; -0.953,20.363 ccw(c-0.953,20.572) v1@-0.79,20.441 ; -0.953,20.363 cw(c-0.953,20.154) v1@-0.79,20.285 ; -0.953,20.363 ccw(c-0.953,20.572) v1@-0.79,20.441 ; -0.953,20.363 cw(c-0.953,20.154) v1@-0.79,20.285 ; -0.953,20.363 ccw(c-0.953,20.572) v1@-0.79,20.441 ; -0.953,20.363 cw(c-0.953,20.154) v1@-0.79,20.285
  Bottom Layer w0.15: U1.18@-1.31,20.43 v1@-0.759,20.43 ; U1.18@-1.156,20.43 cw(c-1.156,19.899) v1@-0.781,20.275 ; U1.18@-1.156,20.43 cw(c-1.156,19.899) v1@-0.781,20.275 ; U1.18@-1.156,20.43 cw(c-1.156,19.899) v1@-0.781,20.275 ; U1.18@-1.156,20.43 cw(c-1.156,19.899) v1@-0.781,20.275 ; U1.18@-1.156,20.43 cw(c-1.156,19.899) v1@-0.781,20.275 ; U1.18@-1.156,20.43 cw(c-1.156,19.899) v1@-0.781,20.275 ; U1.18@-1.156,20.43 cw(c-1.156,19.899) v1@-0.781,20.275 ; U1.18@-1.156,20.43 cw(c-1.156,19.899) v1@-0.781,20.275 ; U1.18@-1.156,20.43 cw(c-1.156,19.899) v1@-0.781,20.275
XOSCO: U1.19 X1.1 | length 9.8
  Top Layer w0.15: X1.1@-2.296,21.445 -2.296,21.316 v1(-1.85,20.87) ; -2.063,21.083 cw(c-2.277,20.87) v1@-1.975,20.87 ; -2.063,21.083 ccw(c-1.85,21.297) v1@-1.85,20.995 ; -2.063,21.083 cw(c-2.277,20.87) v1@-1.975,20.87 ; -2.063,21.083 ccw(c-1.85,21.297) v1@-1.85,20.995 ; -2.063,21.083 cw(c-2.277,20.87) v1@-1.975,20.87 ; -2.063,21.083 ccw(c-1.85,21.297) v1@-1.85,20.995 ; -2.063,21.083 cw(c-2.277,20.87) v1@-1.975,20.87 ; -2.063,21.083 ccw(c-1.85,21.297) v1@-1.85,20.995 ; -2.063,21.083 ccw(c-1.85,21.297) v1@-1.85,20.995 ; -2.063,21.083 cw(c-2.277,20.87) v1@-1.975,20.87 ; -2.063,21.083 ccw(c-1.85,21.297) v1@-1.85,20.995 ; -2.063,21.083 cw(c-2.277,20.87) v1@-1.975,20.87 ; -2.063,21.083 ccw(c-1.85,21.297) v1@-1.85,20.995 ; -2.063,21.083 cw(c-2.277,20.87) v1@-1.975,20.87 ; -2.063,21.083 ccw(c-1.85,21.297) v1@-1.85,20.995 ; -2.063,21.083 cw(c-2.277,20.87) v1@-1.975,20.87 ; -2.063,21.083 ccw(c-1.85,21.297) v1@-1.85,20.995 ; -2.063,21.083 cw(c-2.277,20.87) v1@-1.975,20.87
  Bottom Layer w0.15: v1(-1.85,20.87) -1.81,20.83 U1.19@-1.31,20.83 ; v1@-1.762,20.782 cw(c-1.645,20.665) -1.645,20.83 ; v1@-1.762,20.782 cw(c-1.645,20.665) -1.645,20.83 ; v1@-1.762,20.782 cw(c-1.645,20.665) -1.645,20.83 ; v1@-1.762,20.782 cw(c-1.645,20.665) -1.645,20.83 ; v1@-1.762,20.782 cw(c-1.645,20.665) -1.645,20.83 ; v1@-1.762,20.782 cw(c-1.645,20.665) -1.645,20.83 ; v1@-1.762,20.782 cw(c-1.645,20.665) -1.645,20.83 ; v1@-1.762,20.782 cw(c-1.645,20.665) -1.645,20.83 ; v1@-1.762,20.782 cw(c-1.645,20.665) -1.645,20.83 ; v1@-1.762,20.958 ccw(c-1.452,21.268) U1.19@-1.452,20.83 ; v1@-1.762,20.958 ccw(c-1.452,21.268) U1.19@-1.452,20.83 ; v1@-1.762,20.958 ccw(c-1.452,21.268) U1.19@-1.452,20.83 ; v1@-1.762,20.958 ccw(c-1.452,21.268) U1.19@-1.452,20.83 ; v1@-1.762,20.958 ccw(c-1.452,21.268) U1.19@-1.452,20.83 ; v1@-1.762,20.958 ccw(c-1.452,21.268) U1.19@-1.452,20.83 ; v1@-1.762,20.958 ccw(c-1.452,21.268) U1.19@-1.452,20.83 ; v1@-1.762,20.958 ccw(c-1.452,21.268) U1.19@-1.452,20.83 ; v1@-1.762,20.958 ccw(c-1.452,21.268) U1.19@-1.452,20.83
pads on no net: U11.11

## Polygon pours and split planes (outlines as drawn)
VBAT on Bottom Layer "Top Layer-No Net" (solid, remove dead copper, pour order 1001): 1.54,19.74 1.54,19.05 1.69,18.9 1.96,18.63 2.02,18.63 2.11,18.63 2.28,18.46 2.89,18.46 2.94,18.51 2.94,18.83 2.94,18.86 2.88,18.92 2.87,18.93 2.44,18.93 1.99,18.93 1.74,19.18 1.74,19.75 1.73,19.76 1.56,19.76 1.54,19.74
DCVDD on Bottom Layer "Top Layer-No Net" (solid, remove dead copper, pour order 1000): 0.34,19.74 0.34,19.16 0.34,18.83 0.12,18.61 0.1,18.59 0.1,18.05 0.1,17.04 0.78,17.04 0.95,17.04 1.2,16.79 2,16.79 2,17.59 1.21,17.59 0.78,17.59 0.55,17.82 0.54,17.83 0.54,19.73 0.54,19.74 0.52,19.76 0.39,19.76 0.36,19.76 0.34,19.74
GND on Bottom Layer "Top Layer-No Net" (solid, remove dead copper, pour order 1000): -2.41,16.84 -2.38,16.81 -2.38,16.45 -1.63,16.45 -1.62,16.44 -1.62,16.84 -2.41,16.84
GND on Bottom Layer "Top Layer-No Net" (solid, remove dead copper, pour order 1000): -4.07,28.79 -3.97,28.69 -3.97,-0.12 6.26,-0.12 6.31,-0.07 6.31,28.69 -3.97,28.69 -4.07,28.79
GND on Bottom Layer "Top Layer-No Net" (solid, remove dead copper, pour order 1001): -4.11,28.82 -4.1,28.81 -4.1,21.03 6.27,21.03 6.28,21.02 6.35,21.09 6.35,28.8 -4.1,28.8
GND on SIG "Top Layer-No Net" (solid, remove dead copper, pour order 1002): -4.02,28.83 -4.02,-0.07 6.25,-0.07 6.31,-0.13 6.31,28.85 -3.93,28.85 -4.04,28.74
GND on Top Layer "Top Layer-No Net" (solid, remove dead copper, pour order 1003): -4.08,28.88 -4.13,28.83 -4.13,0.04 6.2,0.04 6.31,-0.07 6.31,29 -3.96,29 -4.07,28.89
GND on Top Layer "Top Layer-No Net" (solid, remove dead copper, pour order 1004): -1.54,10.74 -1.55,10.73 -1.55,-0.03 3.68,-0.03 3.73,-0.08 3.84,0.03 3.84,10.74 -1.52,10.74 -1.54,10.72
GND on GND "Top Layer-No Net" (solid, remove dead copper, pour order 1005): -4.09,28.79 -4.02,28.72 -4.02,-0.07 6.36,-0.07 6.31,-0.02 6.31,28.79 -3.97,28.79

## Keep-outs
Keep-Out Layer:
  circle w0.025: c2.312,-0.003 r0.012
  circle w0.025: c1.153,28.711 r0.012
  lines w0.05: 4.25,14.49 4.32,14.88 ; 4.97,18.02 5.08,18.47 ; -3.949,23.197 -3.929,22.981 -3.896,22.777 -3.851,22.587 -3.228,20.29 -2.682,18.109 -2.234,16.049 -1.979,14.689 -1.746,13.276 -1.532,11.797 -0.947,11.797 cw(c-0.947,11.197) -0.947,10.597 -1.373,10.597 -1.009,7.658 -0.648,4.601 -0.269,1.428 -0.199,0.922 -0.112,0.445 -0.007,-0.003 2.312,-0.003 2.417,0.445 2.504,0.923 2.574,1.428 2.955,4.618 3.316,7.674 3.678,10.597 3.253,10.597 cw(c3.253,11.197) 3.253,11.797 3.837,11.797 4.06,13.33 4.302,14.79 4.566,16.182 5.01,18.203 5.546,20.34 6.156,22.587 6.201,22.777 6.234,22.981 6.254,23.197 5.603,23.197 cw(c5.603,23.797) 5.603,24.397 6.063,24.397 6.015,24.5 5.963,24.594 5.908,24.681 ccw(c-8.019,15.084) 2.479,28.346 2.24,28.493 1.936,28.608 1.572,28.683 1.153,28.711 0.733,28.683 0.369,28.608 0.066,28.493 -0.173,28.346 ccw(c10.324,15.084) -3.603,24.681 -3.658,24.594 -3.71,24.5 -3.758,24.397 -3.297,24.397 cw(c-3.297,23.797) -3.297,23.197 -3.949,23.197

## Other copper
Top Layer:
  pour cut-out: -2.3,16.506 0.638,16.481 1.082,16.239 2.595,16.232 2.595,13.282 1.945,12.632 -2.275,12.632 -2.285,12.622 -2.295,12.632
SIG:
  pour cut-out: 0.67,23.15 0.64,23.12 0.64,19.86 2.49,19.86 2.51,19.84 2.54,19.87 2.54,24.9 2.43,24.9 0.68,23.15
  pour cut-out: -2.3,16.509 0.639,16.483 1.082,16.242 2.595,16.235 2.595,13.285 1.945,12.635 -2.275,12.635 -2.285,12.625 -2.295,12.635
GND:
  pour cut-out: -2.302,16.517 0.637,16.492 1.08,16.25 2.593,16.243 2.593,13.293 1.943,12.643 -2.277,12.643 -2.287,12.633 -2.297,12.643
Bottom Layer:
  pour cut-out: -2.305,16.456 0.732,16.43 1.077,16.242 2.59,16.235 2.59,13.285 1.94,12.635 -2.28,12.635 -2.29,12.625 -2.3,12.635

## Silkscreen, mask and mechanical layers (free items; w line width, h text height)
Top Overlay:
  circle w0.025: c9.747,-0.001 r0.012
  region: 9.759,28.731 9.716,28.531 9.802,28.531
  region: 9.747,-0.001 9.79,0.199 9.704,0.199
  lines w0.05: 1.353,28.711 9.78,28.711 ; 2.512,-0.003 9.77,-0.003 ; 9.75,0.073 9.75,13.89 ; 9.761,14.854 9.761,28.671
  lines w0.08: -2.88,-6.65 10.25,-6.65 ; -2.87,-10.16 10.25,-10.16 ; -2.83,-7.85 10.25,-7.85 ; -2.82,-8.97 10.23,-8.97 ; -2.878,-11.41 -2.878,-5.48 10.27,-5.48 10.27,-11.41 -2.878,-11.41
  text "28.71" at 8.85,14.21 h0.5
  text "YYM-001-L/R-V2.1" at -2.48,-6.28 h0.5
  text "Layer: 4层" at -2.35,-7.46 h0.5
  text "28.71x10.2mm" at 0.98,-7.45 h0.5
  text "Stack Lqayer: TOP--SIG--GND--BOT" at -2.45,-8.65 h0.8
  text "沉金  绿油白字" at 3.89,-9.75 h0.8
  text "FR-4 T=0.8mm" at -2.33,-9.78 h0.5
  text "20250516" at -2.43,-11.01 h0.5
Bottom Overlay:
  lines w0.2: -0.51,22.58 1.89,22.58 1.83,22.52 1.83,20.2 1.79,20.24 -0.45,20.24 -0.46,20.25 -0.46,22.68
  text "B+" at -1.01,26.14 h0.6
  text "DP" at -2.11,24.37 h0.6
  text "DM" at -2.16,21.2 h0.6
  text "2502" at 0.29,7.49 h0.8 r270
  text "YYM001-LR-V2" at 1.61,7.47 h0.8 r270
Mechanical 13:
  drawing of 654 lines, arcs and shapes, not listed
Mechanical 15:
  drawing of 639 lines, arcs and shapes, not listed
Drill Drawing:
  text ".Legend" at 23.36,-0.01 h0.6